# Altium PCB 3_Interface_QuadUART.PcbDoc
Units mm, origin at the board's own origin, x right, y up, seen from the top; angles counter-clockwise.
Board outline 82.5 x 29 mm, 2 copper layers (Top Layer, Bottom Layer); 48 components, 38 nets, 219 pads, 0 vias.
Unrouted connection lines stored in the file: 121.
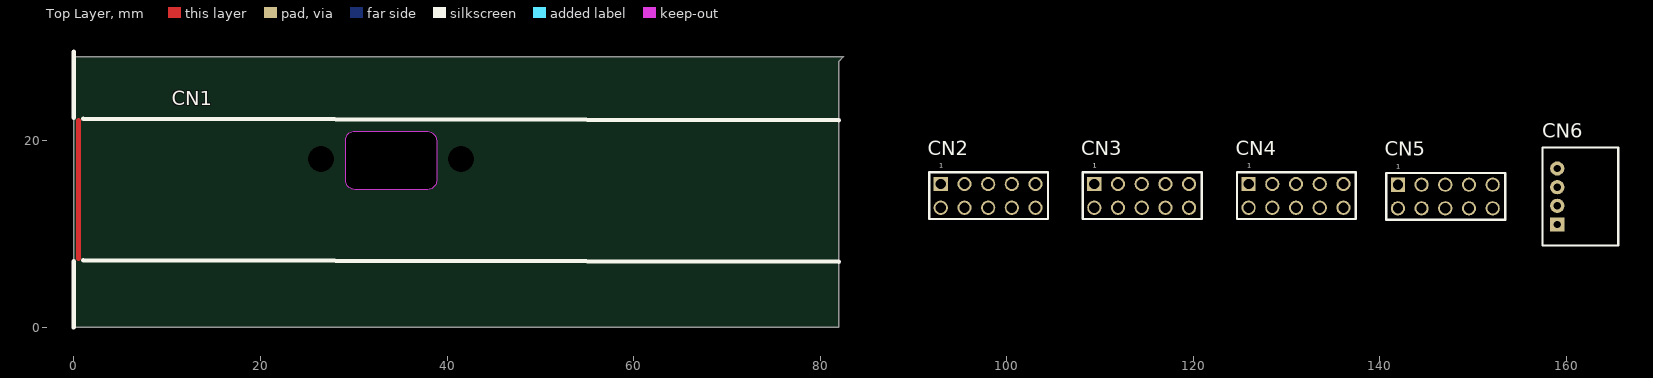
[diagram p0: Top Layer view]
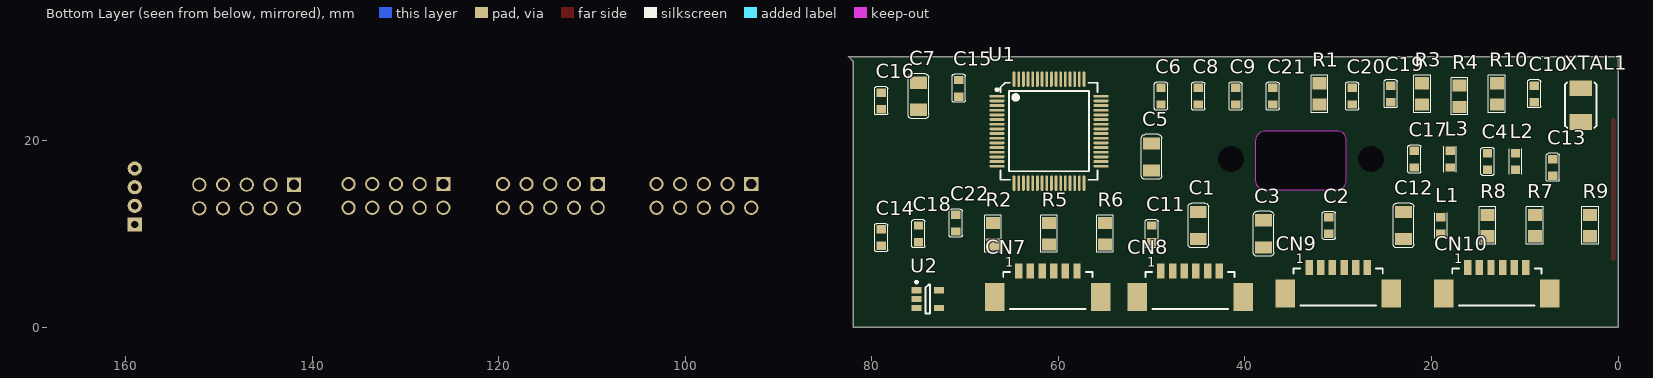
[diagram p1: Bottom Layer view, seen from below]

## Layer stack, top to bottom
Top Solder: solder mask 0.0102, Solder Resist, Dk 3.5
Top Layer: signal copper 0.0356
Dielectric 1: dielectric 0.32, FR-4, Dk 4.8
Bottom Layer: signal copper 0.0356
Bottom Solder: solder mask 0.0102, Solder Resist, Dk 3.5

## Board outline
0,0 0,29 82.5,29 82,28.5 82,0
cut-out: 29.125,15.75 29.125,20.05 cw(c30.075,20.05) 30.075,21 37.825,21 cw(c37.825,19.95) 38.875,19.95 38.875,15.7 cw(c37.925,15.7) 37.925,14.75 30.125,14.75 cw(c30.125,15.75)

## Design rules (kind name [scope] priority, off if disabled: settings)
Clearance [All] p1: gap=0.254 ignorepadtopadclearanceinfootprint=FALSE except(0: Arc-Hole Track-Hole SMDPad-Hole THPad-Hole Via-Hole Fill-Hole Poly-Hole Region-Hole Text-Hole)
PolygonConnect [All] p1: connectstyle=Relief reliefconductorwidth=0.254 reliefentries=4 polygonreliefangle="90 Angle" airgapwidth=0.254
RoutingVias [All] p1: holewidth=0.711 width=1.27 viastyle="Through Hole" minholewidth=0.711 minwidth=1.27 maxholewidth=0.711 maxwidth=1.27
SolderMaskExpansion [All] p1: expansion=0.102
Width [All] p1: maxlimit=0.254 minlimit=0.254 preferedwidth=0.254
30 further rules are at their usual default settings.

## Components (designator, comment, footprint, x,y, rotation, side; value= is the part's Value field where it differs from the comment)
C1 "GRM31CR71E106KA12K" C1206_MD 45,10.889 r90 bottom
C2 "C1608X7R1H104K080AA" C0603_MD 31,10.889 r270 bottom
C3 "GRM31CR71E106KA12K" C1206_MD 38,10 r90 bottom
C4 "C1608X7R1H104K080AA" C0603_MD 14,17.75 r270 bottom
C5 "GRM31CR71E106KA12K" C1206_MD 50,18.25 r90 bottom
C6 "C1608X7R1H104K080AA" C0603_MD 49,24.75 r270 bottom
C7 "GRM31CR71E106KA12K" C1206_MD 75,24.75 r90 bottom
C8 "C1608X7R1H104K080AA" C0603_MD 45,24.75 r270 bottom
C9 "C1608X7R1H104K080AA" C0603_MD 41,24.75 r270 bottom
C10 "C1608X7R1H104K080AA" C0603_MD 9,25 r90 bottom
C11 "C1608X7R1H104K080AA" C0603_MD 50,10 r270 bottom
C12 "GRM31CR71E106KA12K" C1206_MD 23,10.889 r90 bottom
C13 "CL10C120JB8NNNC" C0603_MD 7,17.111 r90 bottom
C14 "CL10C120JB8NNNC" C0603_MD 79,9.593 r90 bottom
C15 "C1608X7R1H104K080AA" C0603_MD 70.67,25.6 r90 bottom
C16 "C1608X7R1H104K080AA" C0603_MD 79,24.25 r90 bottom
C17 "C1608X7R1H104K080AA" C0603_MD 21.84,18 r90 bottom
C18 "C1608X7R1H104K080AA" C0603_MD 75,10 r90 bottom
C19 "C1608X7R1H104K080AA" C0603_MD 24.38,25 r90 bottom
C20 "C1608X7R1H104K080AA" C0603_MD 28.506,24.75 r90 bottom
C21 "C1608X7R1H104K080AA" C0603_MD 37.015,24.75 r270 bottom
C22 "C1608X7R1H104K080AA" C0603_MD 71,11.143 r90 bottom
CN1 "MUSBR-E551-30" "RUGGED USB MINI AB VERTICAL" 34,18 r180 top
CN2 "61301021121" "CONN HEADER 61301021121" 98,14.069 r0 top
CN3 "61301021121" "CONN HEADER 61301021121" 114.46,14.069 r0 top
CN4 "61301021121" "CONN HEADER 61301021121" 131,14.069 r0 top
CN5 "61301021121" "CONN HEADER 61301021121" 147,14 r0 top
CN6 "S4B-PH-K-S(LF)(SN)" "CONN HEADER R/A 4POS 2MM" 159,14 r90 top
CN7 "53398-0671" "PICO BLADE 0533980671" 61.125,4.625 r180 bottom
CN8 "53398-0671" "PICO BLADE 0533980671" 45.875,4.625 r180 bottom
CN9 "53398-0671" "PICO BLADE 0533980671" 30,5 r180 bottom
CN10 "53398-0671" "PICO BLADE 0533980671" 13,5 r180 bottom
L1 "BLM18EG101TN1D" L0603 19,10.889 r270 bottom
L2 "BLM18EG101TN1D" L0603 11,17.75 r270 bottom
L3 "BLM18EG101TN1D" L0603 18,18 r270 bottom
R1 "CRCW080510K0FKEA" R0805_MD 32,25 r270 bottom value=10k
R2 "CRCW080510K0FKEA" R0805_MD 67,10 r270 bottom value=10k
R3 "CRCW080510K0FKEA" R0805_MD 21,25 r270 bottom value=10k
R4 "RMCF0805FT12K0" R0805_MD 17,24.75 r270 bottom
R5 "CRCW080510K0FKEA" R0805_MD 61,10 r270 bottom value=10k
R6 "CRCW080510K0FKEA" R0805_MD 55,10 r270 bottom value=10k
R7 "CRCW080510K0FKEA" R0805_MD 8.92,10.889 r270 bottom value=10k
R8 "CRCW080510K0FKEA" R0805_MD 14,10.889 r270 bottom value=10k
R9 "CRCW080510K0FKEA" R0805_MD 3,10.889 r270 bottom value=10k
R10 "CRCW080510K0FKEA" R0805_MD 13,25 r270 bottom value=10k
U1 "IC USB HS QUAD UART" LQFP-64 61,21 r180 bottom
U2 "TPS79333DBVR" SOT23-5 74,3 r180 bottom
XTAL1 "AA-12.000MAGE-T" "TXC 7A Series" 4,23.8 r90 bottom

## Footprints (in the part's own frame and the unit in brackets; to place one, negate y for a bottom-side part, rotate by r counter-clockwise, add the part's x,y. Pads: shape width x height; smd on the part's side, far side on the other; paste and mask are expansions set on the pad)
C0603_MD [mm] "Chip Capacitor, Body 1.6x0.8mm, IPC Medium Density"
  rect 0.9x1 smd: 1(-0.889,0) 2(0.889,0)
  silkscreen extent -1.5,-0.7 1.5,0.7, body extent -1,-0.41 1,0.38, height 0.79
C1206_MD [mm] "Chip Capacitor, Body 3.2x1.6mm, IPC Medium Density"
  rect 1.3x1.8 smd: 1(-1.45,0) 2(1.45,0)
  silkscreen extent -2.4,-1.1 2.4,1.1, body extent -2,-0.81 2,0.79, height 1.53
"CONN HEADER 61301021121" [mil] "CONN HEADER VERT 10POS 2.54MM"
  rect 60x60 hole 43.31 paste+0: 1(-200,50)
  round 60 hole 43.31 paste+0: 2(-100,50) 3(0,50) 4(100,50) 5(200,50) 6(-200,-50) 7(-100,-50) 8(0,-50) 9(100,-50) 10(200,-50)
  silkscreen extent -249,-98 253,99, body extent -249,-99 251,101, height 336
"CONN HEADER R/A 4POS 2MM" [mm] "Connector Header Through Hole, Right Angle 4 position 0.079\" (2.00mm)"
  rect 1.524x1.524 hole 0.8: 1(-3,0)
  round 1.524 hole 0.8: 2(-1,0) 3(1,0) 4(3,0)
  silkscreen extent -5.25,-6.53 5.25,1.58, body extent -4.95,-6.25 4.95,1.35, height 4.83
L0603 [mm]
  rect 0.9x1 smd: 1(-0.889,0) 2(0.889,0)
  silkscreen extent -1.38,-0.67 1.38,0.67, body extent -0.8,-0.4 0.8,0.4, height 0.95
LQFP-64 [mm] "64-Pin LQFP 0.5 mm Pitch"
  oval 1.65x0.3 smd: 1(-5.575,3.75) 2(-5.575,3.25) 3(-5.575,2.75) 4(-5.575,2.25) 5(-5.575,1.75) 6(-5.575,1.25) 7(-5.575,0.75) 8(-5.575,0.25) 9(-5.575,-0.25) 10(-5.575,-0.75) 11(-5.575,-1.25) 12(-5.575,-1.75) 13(-5.575,-2.25) 14(-5.575,-2.75) 15(-5.575,-3.25) 16(-5.575,-3.75) 33(5.575,-3.75) 34(5.575,-3.25) 35(5.575,-2.75) 36(5.575,-2.25) 37(5.575,-1.75) 38(5.575,-1.25) 39(5.575,-0.75) 40(5.575,-0.25) 41(5.575,0.25) 42(5.575,0.75) 43(5.575,1.25) 44(5.575,1.75) 45(5.575,2.25) 46(5.575,2.75) 47(5.575,3.25) 48(5.575,3.75)
  oval 0.3x1.65 smd: 17(-3.75,-5.575) 18(-3.25,-5.575) 19(-2.75,-5.575) 20(-2.25,-5.575) 21(-1.75,-5.575) 22(-1.25,-5.575) 23(-0.75,-5.575) 24(-0.25,-5.575) 25(0.25,-5.575) 26(0.75,-5.575) 27(1.25,-5.575) 28(1.75,-5.575) 29(2.25,-5.575) 30(2.75,-5.575) 31(3.25,-5.575) 32(3.75,-5.575) 49(3.75,5.575) 50(3.25,5.575) 51(2.75,5.575) 52(2.25,5.575) 53(1.75,5.575) 54(1.25,5.575) 55(0.75,5.575) 56(0.25,5.575) 57(-0.25,5.575) 58(-0.75,5.575) 59(-1.25,5.575) 60(-1.75,5.575) 61(-2.25,5.575) 62(-2.75,5.575) 63(-3.25,5.575) 64(-3.75,5.575)
  silkscreen extent -5.7,-5.2 5.2,5.2, body extent -6,-6 6,6, height 1.6
"PICO BLADE 0533980671" [mm] "CONN HEADER SMD 6POS 1.25MM"
  rect 2.1x3 smd: 0(-5.675,-1.375) 0(5.675,-1.375)
  rect 0.8x1.6 smd: 1(-3.125,1.375) 2(-1.875,1.375) 3(-0.625,1.375) 4(0.625,1.375) 5(1.875,1.375) 6(3.125,1.375)
  silkscreen extent -4.77,-2.7 4.77,1.3, body extent -6.32,-2.5 6.32,1.7, height 4.7
R0805_MD [mm] "Chip Resistor, Body 2.0x1.3mm, IPC Medium Density"
  rect 1.3x1.5 smd: 1(-1.143,0) 2(1.143,0)
  silkscreen extent -2,-0.9 2,0.9, body extent -1,-0.63 1,0.63, height 0.47
"RUGGED USB MINI AB VERTICAL" [mm]
  round 1.524 hole 2.8: S0(-7.5,0) S1(7.5,0)
  Top Layer pour cut-out: -3.875,-3 3.875,-3 4.258,-2.924 4.582,-2.707 4.799,-2.383 4.875,-2 4.875,-2 4.875,2.25 4.799,2.633 4.582,2.957 4.258,3.174 3.875,3.25 3.875,3.25 -3.875,3.25 -4.258,3.174 -4.582,2.957 -4.799,2.633 -4.875,2.25 -4.875,2.25 -4.875,-2 -4.799,-2.383 -4.582,-2.707 -4.258,-2.924 -3.875,-3
  Top Layer pour cut-out: 0,0
  body extent -32,-5 23.8,27.75, height 64.69
SOT23-5 [mm]
  rect 1.1x0.65 smd: 1(-1.2,0.95) 2(-1.2,0) 3(-1.2,-0.95) 4(1.2,-0.95) 5(1.2,0.95)
  silkscreen extent -1.32,-1.55 0.25,1.95, body extent -1.5,-1.5 1.5,1.5, height 1.3
"TXC 7A Series" [mm]
  rect 1.7x2.4 smd: 1(-1.8,0) 2(1.8,0)
  silkscreen extent -2.45,-1.7 2.45,1.7, body extent -2.5,-1.6 2.5,1.6, height 1.35

## Part data
C1 C3 C5 C7 C12: "CAP CER 10UF 25V X7R 1206", Capacitance=10uF, Case/Package=1206, Dielectric=X7R, Manufacturer=Murata, Max Operating Temperature=125°C, Min Operating Temperature=-55°C, Supplier Part Number 1=490-14678-1-ND, Tolerance=10%, Voltage=25V, ComponentLink1Description=https://www.murata.com/~/media/webrenewal/support/library/catalog/products/capacitor/mlcc/c02e.ashx?la=en-us&src-supplier=Digi-Key, ComponentLink1URL=https://www.murata.com/~/media/webrenewal/support/library/catalog/products/capacitor/mlcc/c02e.ashx?la=en-us&src-supplier=Digi-Key, ComponentLink2Description=https://search.murata.co.jp/Ceramy/image/img/A01X/G101/ENG/GRM31CR71E106KA12-01.pdf?src-supplier=Digi-Key, ComponentLink2URL=https://search.murata.co.jp/Ceramy/image/img/A01X/G101/ENG/GRM31CR71E106KA12-01.pdf?src-supplier=Digi-Key, Lead Free="Lead Free", Length=0.126inch, Manufacturer Part Number=GRM31CR71E106KA12K, Mount="Surface Mount", Packaging="Tape and Reel", Pricing 1="1=0.88, 10=0.652, 100=0.4469, 500=0.35378, 1000=0.29792, 2500=0.2793 (USD)", Pricing 2="1=0.88, 10=0.652, 100=0.446, 250=0.446, 500=0.353, 1000=0.297 (USD)", Stock 1=11567, Stock 2=5051, Supplier 1=Digi-Key, Supplier 2=Mouser, Supplier Part Number 2=81-GRM31CR71E106KA2K, Thickness=0.071inch, Voltage Rating=25V, Voltage Rating (DC)=25V, Width=0.063inch
C2 C4 C6 C8 C9 C10 C11 C15 C16 C17 C18 C19 C20 C21 C22: "TDK - C1608X7R1H104K080AA - SMD Multilayer Ceramic Capacitor, 0.1 µF, 50 V, 0603 [1608 Metric], ± 10%, X7R, C Series", Capacitance=100nF, Case/Package=0603, Case Code (Metric)=1608, Dielectric=X7R, Dielectric Material=Ceramic, Manufacturer=TDK, Max Operating Temperature=125°C, Min Operating Temperature=-55°C, Package Quantity=1, Supplier Part Number 1=445-1314-1-ND, Tolerance=10%, Voltage=50V, Case Code (Imperial)=0603, ComponentLink1Description=https://product.tdk.com/info/en/catalog/spec/mlccspec_commercial_general_midvoltage_en.pdf?src-supplier=Digi-Key, ComponentLink1URL=https://product.tdk.com/info/en/catalog/spec/mlccspec_commercial_general_midvoltage_en.pdf?src-supplier=Digi-Key, ComponentLink2Description=http://uk.rs-online.com/webdocs/13d1/0900766b813d1103.pdf?src-supplier=RSComponents, ComponentLink2URL=http://uk.rs-online.com/webdocs/13d1/0900766b813d1103.pdf?src-supplier=RSComponents, ComponentLink3Description=http://www.tdk.co.jp/tefe02/e412_c.pdf?src-supplier=Avnet+Europe, ComponentLink3URL=http://www.tdk.co.jp/tefe02/e412_c.pdf?src-supplier=Avnet+Europe, ComponentLink4Description=http://www.farnell.com/datasheets/2792994.pdf?src-supplier=Farnell, ComponentLink4URL=http://www.farnell.com/datasheets/2792994.pdf?src-supplier=Farnell, ComponentLink5Description=http://www.farnell.com/datasheets/1744655.pdf?src-supplier=Element14, ComponentLink5URL=http://www.farnell.com/datasheets/1744655.pdf?src-supplier=Element14, Composition=Ceramic, Depth=0.8mm, Height=0.8mm, Lead Free="Lead Free", Length=1.6mm, Manufacturer Part Number=C1608X7R1H104K080AA, Mount="Surface Mount", Number of Pins=2, Packaging="Tape and Reel", Pricing 1="1=0.12, 10=0.088, 100=0.0413, 500=0.02896, 1000=0.02397 (USD)", Pricing 2="1=0.12, 10=0.088, 100=0.041, 500=0.029, 1000=0.024, 4000=0.017, 8000=0.016, 24000=0.013, 48000=0.011 (USD)", Radiation Hardening=No, REACH SVHC="No SVHC", Stock 1=513759, Stock 2=34512, Supplier 1=Digi-Key, Supplier 2=Mouser, Supplier Part Number 2=810-C1608X7R1H104K, Termination=SMD/SMT, Thickness=0.037inch, Voltage Rating=50V, Voltage Rating (DC)=50V, Weight=7.1E-05oz, Width=0.8mm
C13 C14: "Cap Ceramic 12pF 50VDC C0G 5% SMD 0603 Paper T/R", Capacitance=12pF, Case/Package=0603, Case Code (Metric)=1608, Dielectric=C0G, Manufacturer=Samsung, Max Operating Temperature=125°C, Min Operating Temperature=-55°C, Package Quantity=1, Supplier Part Number 1=1276-1254-1-ND, Temperature Coefficient=300ppm/°C, Tolerance=5%, Voltage=50V, Case Code (Imperial)=0603, ComponentLink1Description=https://media.digikey.com/pdf/Data%20Sheets/Samsung%20PDFs/CL_Series_MLCC_ds.pdf?src-supplier=Digi-Key, ComponentLink1URL=https://media.digikey.com/pdf/Data%20Sheets/Samsung%20PDFs/CL_Series_MLCC_ds.pdf?src-supplier=Digi-Key, ComponentLink2Description=https://www.verical.com/server-webapp/html/getDatasheet?partID=640658&src-supplier=Verical, ComponentLink2URL=https://www.verical.com/server-webapp/html/getDatasheet?partID=640658&src-supplier=Verical, ComponentLink3Description=https://produktinfo.conrad.com/datenblaetter/450000-474999/457317-da-01-en-VS_KONDENSATOR_0603.pdf?src-supplier=Conrad, ComponentLink3URL=https://produktinfo.conrad.com/datenblaetter/450000-474999/457317-da-01-en-VS_KONDENSATOR_0603.pdf?src-supplier=Conrad, Contact Plating=Tin, Depth=0.8mm, Height=0.8mm, Lead Free="Lead Free", Length=1.6mm, Manufacturer Part Number=CL10C120JB8NNNC, Material=Ceramic, Mount="Surface Mount", Packaging="Tape and Reel", Pricing 1="1=0.1, 10=0.045, 100=0.0201, 500=0.01436, 1000=0.01128 (USD)", Radiation Hardening=No, Stock 1=64675, Supplier 1=Digi-Key, Thickness=0.035inch, Voltage Rating=50V, Voltage Rating (DC)=50V, Width=0.031inch
CN1: "RUGGED USB MINI AB VERTICAL", Manufacturer="Amphenol Commercial", Ratings="IP67,Waterproof,Dust Tight", Supplier Part Number 1=MUSBR-E551-30-ND, ComponentLink1Description=https://www.amphenolcanada.com/ProductSearch/Drawings/AC/MUSBRE551XX.pdf?src-supplier=Digi-Key, ComponentLink1URL=https://www.amphenolcanada.com/ProductSearch/Drawings/AC/MUSBRE551XX.pdf?src-supplier=Digi-Key, Connector Type=USB, Features=Shielded, Gender=Receptacle, Manufacturer Part Number=MUSBR-E551-30, Mount="Through Hole,Vertical", Number of Contacts=5, Packaging=Tray, Pricing 1="1=10.83, 10=9.846, 25=9.6, 50=8.8614, 100=8.3691, 250=7.63064, 500=7.13836, 1000=7.111 (USD)", Pricing 2="1=10.83, 10=9.84, 25=8.86, 100=8.36, 250=7.81, 500=7.81 (USD)", Stock 1=160, Stock 2=65, Supplier 1=Digi-Key, Supplier 2=Mouser, Supplier Part Number 2=523-MUSBR-E551-30
CN2 CN3 CN4 CN5: "WURTH ELEKTRONIK - 61301021121 - Board-To-Board Connector, 2.54 mm, 10 Contacts, Header, WR-PHD Series, Through Hole, 2 Rows", Color=Black, Current Rating=3A, Flammability Rating="UL94 V-0", Insulation Resistance=1GR, Manufacturer="Wurth Electronics", Max Operating Temperature=125°C, Min Operating Temperature=-40°C, Package Quantity=2000, Supplier Part Number 1=732-2672-ND, Voltage Rating=250V, ComponentLink1Description=http://www.farnell.com/datasheets/1442180.pdf?src-supplier=Mouser, ComponentLink1URL=http://www.farnell.com/datasheets/1442180.pdf?src-supplier=Mouser, ComponentLink2Description=https://katalog.we-online.de/em/datasheet/6130xx21121.pdf?src-supplier=Digi-Key, ComponentLink2URL=https://katalog.we-online.de/em/datasheet/6130xx21121.pdf?src-supplier=Digi-Key, ComponentLink3Description=http://www.farnell.com/datasheets/1442180.pdf?src-supplier=Element14, ComponentLink3URL=http://www.farnell.com/datasheets/1442180.pdf?src-supplier=Element14, Connector Type="Male Pin", Contact Gender=Male, Contact Material="Copper Alloy,Copper", Contact Mating Length=0.236inch, Contact Plating=Gold, Gender=Male, Height=2.54mm, Housing Material=PBT, Insulation=Insulated, Length=12.7mm, Manufacturer Part Number=61301021121, Mount="Through Hole", Number of Contacts=10, Number of Positions=10, Number of Rows=2, Orientation=Straight, Packaging=Bulk, Pitch=2.54mm, Pricing 1="1=1.04, 10=1.019, 50=0.941, 100=0.862, 250=0.784 (USD)", Pricing 2="1=1.04, 10=1.01, 25=1.01, 50=0.941, 100=0.862, 250=0.784, 1000=0.671, 2500=0.598 (USD)", REACH SVHC=Unknown, Row Spacing=0.1inch, Stock 1=4128, Stock 2=5415, Supplier 1=Digi-Key, Supplier 2=Mouser, Supplier Part Number 2=710-61301021121, Termination="Through Hole", Width=12.7mm
CN6: "JST (JAPAN SOLDERLESS TERMINALS) - S4B-PH-K-S (LF)(SN) - CONNECTOR, HEADER, 2MM, 4 POSITION, 1ROW", Color=Natural,White, Contact Resistance=10mR, Current Rating=2A, Flammability Rating="UL94 V-0", Housing Color=Natural, Insulation Resistance=1GR, Manufacturer=JST, Max Operating Temperature=85°C, Min Operating Temperature=-25°C, Supplier Part Number 1=455-1721-ND, Voltage Rating=100V, ComponentLink1Description=http://www.jst-mfg.com/product/pdf/eng/ePH.pdf?src-supplier=Digi-Key, ComponentLink1URL=http://www.jst-mfg.com/product/pdf/eng/ePH.pdf?src-supplier=Digi-Key, Connector Type="Male Pin", Contact Material=Tin,Brass,Bronze, Contact Mating Length=0.13inch, Contact Plating=Tin, Fastening Type=Detent, Gender=Male, Height=9.4mm, Lead Free="Lead Free", Lead Pitch=2mm, Length=9.9mm, Manufacturer Part Number=S4B-PH-K-S(LF)(SN), Mount="Through Hole", Number of Contacts=4, Number of Pins=4, Number of Poles=4, Number of Positions=4, Number of Rows=1, Orientation="Right Angle", Packaging=Bulk, Pitch=2mm, Pricing 1="1=0.22, 10=0.208, 100=0.144, 500=0.12186, 1000=0.0997, 5000=0.08862, 10000=0.08031 (USD)", REACH SVHC="No SVHC", Stock 1=71034, Supplier 1=Digi-Key, Termination=Solder, Voltage Rating (AC)=100V, Width=4.5mm, Working Voltage=100V
CN7 CN8 CN9 CN10: "1.25mm Pitch PicoBlade™ Header, Surface Mount, Vertical, 6 Circuits", Color=Natural, Contact Resistance=20mR, Current Rating=1A, Flammability Rating="UL94 V-0", Insulation Resistance=100MR, Manufacturer=Molex, Max Operating Temperature=85°C, Min Operating Temperature=-40°C, Package Quantity=1000, Supplier Part Number 1=WM7610DKR-ND, Voltage Rating=125V, Body Plating=Tin, ComponentLink1Description=https://www.molex.com/pdm_docs/sd/533980671_sd.pdf?src-supplier=Digi-Key, ComponentLink1URL=https://www.molex.com/pdm_docs/sd/533980671_sd.pdf?src-supplier=Digi-Key, Contact Material=Bronze,Tin, Contact Plating=Tin, Gender=Male, Glow Wire Compliant=Non-compliant, Housing Color=Natural, Housing Material=Nylon, Lead Free="Lead Free", Lead Pitch=1.25mm, Manufacturer Part Number=53398-0671, Mount="Surface Mount", Number of Circuits=6, Number of Contacts=6, Number of Positions=6, Number of Rows=1, Orientation=Vertical, Packaging="Tape and Reel", Pitch=1.25mm, Pricing 1="1=1.39, 10=1.26, 100=1.0802, 500=0.90014 (USD)", Pricing 2="1=1.15, 10=1.01, 100=0.864, 500=0.727, 1000=0.427, 2000=0.374 (USD)", Radiation Hardening=No, REACH SVHC=Unknown, Stock 1=21086, Stock 2=26, Supplier 1=Digi-Key, Supplier 2=Mouser, Supplier Part Number 2=538-53398-0671, Termination=Solder, Voltage Rating (AC)=125V, Voltage Rating (DC)=125V, Working Voltage=125V
L1 L2 L3: "FERRITE BEAD 100 OHM 0603 1LN", Case/Package=0603, Case Code (Metric)=1608, Current Rating=2A, DC Resistance (DCR)=45mR, Manufacturer=Murata, Max Operating Temperature=125°C, Min Operating Temperature=-55°C, Package Quantity=1, Supplier Part Number 1=490-5978-1-ND, Test Frequency=100MHz, Tolerance=25%, Case Code (Imperial)=0603, ComponentLink1Description=https://www.murata.com/en-global/products/productdata/8796733767710/S0580E.pdf?src-supplier=Digi-Key, ComponentLink1URL=https://www.murata.com/en-global/products/productdata/8796733767710/S0580E.pdf?src-supplier=Digi-Key, ComponentLink2Description=http://www.murata.com/products/catalog/pdf/c31e.pdf?src-supplier=Element14, ComponentLink2URL=http://www.murata.com/products/catalog/pdf/c31e.pdf?src-supplier=Element14, ComponentLink3Description=http://search.murata.co.jp/Ceramy/image/img/PDF/ENG/L0110S0101BLM18E.pdf?src-supplier=Avnet, ComponentLink3URL=http://search.murata.co.jp/Ceramy/image/img/PDF/ENG/L0110S0101BLM18E.pdf?src-supplier=Avnet, ComponentLink4Description=http://search.murata.co.jp/Ceramy/image/img/PDF/ENG/L0110S0101BLM18E.pdf?src-supplier=Avnet+Europe, ComponentLink4URL=http://search.murata.co.jp/Ceramy/image/img/PDF/ENG/L0110S0101BLM18E.pdf?src-supplier=Avnet+Europe, ComponentLink5Description=http://search.murata.co.jp/Ceramy/image/img/PDF/ENG/L0110S0101BLM18E.pdf?src-supplier=Future+Electronics, ComponentLink5URL=http://search.murata.co.jp/Ceramy/image/img/PDF/ENG/L0110S0101BLM18E.pdf?src-supplier=Future+Electronics, ComponentLink6Description=http://uk.rs-online.com/webdocs/11b5/0900766b811b5866.pdf?src-supplier=RSComponents, ComponentLink6URL=http://uk.rs-online.com/webdocs/11b5/0900766b811b5866.pdf?src-supplier=RSComponents, ComponentLink7Description=http://www.produktinfo.conrad.com/datenblaetter/1100000-1199999/001172263-da-01-en-DROSSEL_0603_100R_1_6X0_8MM_4000ST.pdf?src-supplier=Conrad, ComponentLink7URL=http://www.produktinfo.conrad.com/datenblaetter/1100000-1199999/001172263-da-01-en-DROSSEL_0603_100R_1_6X0_8MM_4000ST.pdf?src-supplier=Conrad, ComponentLink8Description=http://www.produktinfo.conrad.com/datenblaetter/1100000-1199999/001171697-da-01-en-CHIP_DROSSEL0603_100R_2000MA_1_6X0_8MM.pdf?src-supplier=Conrad, ComponentLink8URL=http://www.produktinfo.conrad.com/datenblaetter/1100000-1199999/001171697-da-01-en-CHIP_DROSSEL0603_100R_2000MA_1_6X0_8MM.pdf?src-supplier=Conrad, Contact Plating=Tin,Matte, Core Material=Ferrite, Depth=0.8mm, Height=0.8mm, Impedance=100R, Lead Free="Lead Free", Length=1.6mm, Manufacturer Part Number=BLM18EG101TN1D, Material=Ferrite,Steel, Max Current Rating=2A, Max DC Current=2A, Number of Circuits=1, Number of Lines=1, Number of Pins=2, Packaging="Tape and Reel", Pricing 1="1=0.23, 10=0.175, 25=0.1452, 50=0.1252, 100=0.1126, 250=0.09508, 500=0.08508, 1000=0.07257 (USD)", Pricing 2="1=0.22, 10=0.125, 100=0.095, 500=0.081, 1000=0.072, 4000=0.063 (USD)", REACH SVHC="No SVHC", Stock 1=64347, Stock 2=10695, Supplier 1=Digi-Key, Supplier 2=Mouser, Supplier Part Number 2=81-BLM18EG101TN1D, Termination=SMD/SMT, Width=0.8mm
R1 R2 R3 R5 R6 R7 R8 R9 R10: "RES 10.0K OHM 1/8W 1% 0805 SMD", Case/Package=0805, Case Code (Metric)=2012, Manufacturer="Vishay Dale", Max Operating Temperature=155°C, Min Operating Temperature=-55°C, Package Quantity=5000, Power=1/8W, Power Rating=125mW, Resistance=10kR, Supplier Part Number 1=52K9795, Temperature Coefficient=100ppm/°C, Tolerance=1%, Voltage Rating=150V, Case Code (Imperial)=0805, ComponentLink1Description=http://www.mouser.com/ds/2/427/dcrcwe3-109170.pdf?src-supplier=Mouser, ComponentLink1URL=http://www.mouser.com/ds/2/427/dcrcwe3-109170.pdf?src-supplier=Mouser, ComponentLink2Description=http://uk.rs-online.com/webdocs/0d98/0900766b80d98b26.pdf?src-supplier=RSComponents, ComponentLink2URL=http://uk.rs-online.com/webdocs/0d98/0900766b80d98b26.pdf?src-supplier=RSComponents, ComponentLink3Description=http://www.alliedelec.com/m/d/0c934d6939ccefa68dbe0b96d821c8cf.pdf?src-supplier=Allied+Electronics, ComponentLink3URL=http://www.alliedelec.com/m/d/0c934d6939ccefa68dbe0b96d821c8cf.pdf?src-supplier=Allied+Electronics, ComponentLink4Description=http://www.vishay.com/docs/20035/dcrcwe3.pdf?src-supplier=Avnet+Asia, ComponentLink4URL=http://www.vishay.com/docs/20035/dcrcwe3.pdf?src-supplier=Avnet+Asia, ComponentLink5Description=http://www.vishay.com/docs/20035/dcrcwe3.pdf?src-supplier=Avnet+Europe, ComponentLink5URL=http://www.vishay.com/docs/20035/dcrcwe3.pdf?src-supplier=Avnet+Europe, ComponentLink6Description=http://www.farnell.com/datasheets/2310790.pdf?src-supplier=Element14, ComponentLink6URL=http://www.farnell.com/datasheets/2310790.pdf?src-supplier=Element14, ComponentLink7Description=http://www.vishay.com/docs/20035/dcrcwe3.pdf?src-supplier=Avnet, ComponentLink7URL=http://www.vishay.com/docs/20035/dcrcwe3.pdf?src-supplier=Avnet, ComponentLink8Description=http://www.vishay.com/docs/20035/dcrcwe3.pdf?src-supplier=Future+Electronics, ComponentLink8URL=http://www.vishay.com/docs/20035/dcrcwe3.pdf?src-supplier=Future+Electronics, Composition="Thick Film", Contact Plating=Tin, Depth=1.25mm, Height=0.45mm, Lead Free="Lead Free", Length=2mm, Manufacturer Part Number=CRCW080510K0FKEA, Military Standard=Not, Mount Type=SMD, Packaging="Tape and Reel", Pricing 2="1=0.1, 10=0.062, 100=0.025, 1000=0.01, 5000=0.007, 10000=0.006, 25000=0.005 (USD)", Pricing 6="1=0.1, 10=0.062, 100=0.0254, 1000=0.01142, 2500=0.00991 (USD)", Radiation Hardening=No, REACH SVHC=Unknown, Stock 2=101022, Stock 6=1354479, Supplier 1=Newark, Supplier 2=Mouser, Supplier 3=Digi-Key, Supplier 4=Allied, Supplier 5=Farnell, Supplier 6=Digi-Key, Supplier Part Number 2=71-CRCW0805-10K-E3, Supplier Part Number 3=541-10.0KCCT-ND, Supplier Part Number 4=70201192, Supplier Part Number 5=1632457, Supplier Part Number 6=541-10.0KCDKR-ND, Termination=SMD/SMT, Voltage Rating (DC)=150V, Weight=0.000194oz, Width=1.25mm
R4: "Resistor, SMT, 0805, 12K Ohm, +/-1%, +/-100ppm, Thk Film, T/R Marked", Case/Package=0805, Case Code (Metric)=2012, Manufacturer="Stackpole Electronics", Max Operating Temperature=155°C, Max Power Dissipation=125mW, Min Operating Temperature=-55°C, Resistance=12kR, Supplier Part Number 1=RMCF0805FT12K0CT-ND, Temperature Coefficient=100ppm/°C, Tolerance=1%, Case Code (Imperial)=0805, ComponentLink1Description=https://www.seielect.com/catalog/SEI-RMCF_RMCP.pdf?src-supplier=Avnet, ComponentLink1URL=https://www.seielect.com/catalog/SEI-RMCF_RMCP.pdf?src-supplier=Avnet, ComponentLink2Description=https://www.seielect.com/Catalog/SEI-RMCF_RMCP.pdf?src-supplier=Digi-Key, ComponentLink2URL=https://www.seielect.com/Catalog/SEI-RMCF_RMCP.pdf?src-supplier=Digi-Key, ComponentLink3Description=https://www.seielect.com/catalog/SEI-Packaging.pdf?src-supplier=Digi-Key, ComponentLink3URL=https://www.seielect.com/catalog/SEI-Packaging.pdf?src-supplier=Digi-Key, ComponentLink4Description=http://seielect.com/Catalog/SEI-RMCF_RMCP.pdf?src-supplier=Future+Electronics, ComponentLink4URL=http://seielect.com/Catalog/SEI-RMCF_RMCP.pdf?src-supplier=Future+Electronics, ComponentLink5Description=http://components.arrow.com/part/dataview/40964023S7542466N1174?src-supplier=Arrow, ComponentLink5URL=http://components.arrow.com/part/dataview/40964023S7542466N1174?src-supplier=Arrow, Composition="Thick Film", Contact Plating=Tin,Matte, Features="Automotive AEC-Q200", Height=0.026inch, Lead Free="Lead Free", Length=0.079inch, Manufacturer Part Number=RMCF0805FT12K0, Mount="Surface Mount", Number of Terminations=2, Packaging="Tape and Reel", Power Rating=125mW, Pricing 1="1=0.1, 10=0.026, 100=0.0104, 1000=0.00466, 2500=0.00405 (USD)", Radiation Hardening=No, Stock 1=30304, Supplier 1=Digi-Key, Width=0.049inch
U1: library part FT4232HL-REEL, "FTDI - FT4232HL-REEL - USB-UART/MPSSE, 4232, QUAD, 64LQFP", Case/Package=LQFP, Dual Supply Voltage=3.3V, Manufacturer=FTDI, Max Operating Temperature=85°C, Max Supply Voltage=3.63V, Min Operating Temperature=-40°C, Min Supply Voltage=1.62V, Operating Supply Current=70mA, Package Quantity=1000, Supplier Part Number 1=768-1026-1-ND, ComponentLink1Description=http://www.ftdichip.com/Support/Documents/AppNotes/AN_128_User_Guide_For_FT4232H_Factory%20test%20utility.pdf?src-supplier=Digi-Key, ComponentLink1URL=http://www.ftdichip.com/Support/Documents/AppNotes/AN_128_User_Guide_For_FT4232H_Factory%20test%20utility.pdf?src-supplier=Digi-Key, ComponentLink2Description=http://www.alliedelec.com/images/products/datasheets/bm/FTDI/70403916.pdf?src-supplier=Allied+Electronics, ComponentLink2URL=http://www.alliedelec.com/images/products/datasheets/bm/FTDI/70403916.pdf?src-supplier=Allied+Electronics, ComponentLink3Description=http://www.ftdichip.com/Support/Documents/DataSheets/ICs/DS_FT4232H.pdf?src-supplier=Future+Electronics, ComponentLink3URL=http://www.ftdichip.com/Support/Documents/DataSheets/ICs/DS_FT4232H.pdf?src-supplier=Future+Electronics, ComponentLink4Description=https://www.verical.com/server-webapp/html/getDatasheet?partID=643215&src-supplier=Verical, ComponentLink4URL=https://www.verical.com/server-webapp/html/getDatasheet?partID=643215&src-supplier=Verical, ComponentLink5Description=http://datasheet.iiic.cc/ftdi/FT4232HL-REEL.pdf?src-supplier=IIIC, ComponentLink5URL=http://datasheet.iiic.cc/ftdi/FT4232HL-REEL.pdf?src-supplier=IIIC, Data Rate=480Mbps, ESD Protection=Yes, Height=1.4mm, Interface=UART, Lead Free="Lead Free", Length=10.1mm, Manufacturer Part Number=FT4232HL-REEL, Mount="Surface Mount", Number of Channels=1, Number of Pins=64, Number of Transceivers=4, Operating Supply Voltage=3.3V, Packaging="Tape and Reel", Pricing 1="1=8.3, 10=8.09, 50=7.46, 100=7.14, 500=6.88006 (USD)", Pricing 2="1=8.3, 25=8.09, 50=7.46, 100=7.14, 500=6.88, 1000=6.08 (USD)", Radiation Hardening=No, Stock 1=18748, Stock 2=21282, Supplier 1=Digi-Key, Supplier 2=Mouser, Supplier Part Number 2=895-FT4232HL, Weight=0.012088oz, Width=10.1mm
U2: "TEXAS INSTRUMENTS - TPS79333DBVR - IC, V REG, LINEAR, 0.2A, SOT-23-5", Case/Package=SOT-23, Current Rating=200mA, Dropout Voltage=102mV, Input Bias Current=170uA, Manufacturer="Texas Instruments", Max Input Voltage=5.5V, Max Operating Temperature=125°C, Max Output Voltage=3.3V, Max Power Dissipation=560mW, Min Current Limit=285mA, Min Input Voltage=2.7V, Min Operating Temperature=-40°C, Output Voltage Accuracy=2%, Package Quantity=1, Quiescent Current=200uA, Supplier Part Number 1=296-12961-1-ND, Accuracy=2%, ComponentLink1Description=http://www.ti.com/general/docs/lit/getliterature.tsp?genericPartNumber=TPS793&amp;&amp;fileType=pdf&src-supplier=Farnell, ComponentLink1URL=http://www.ti.com/general/docs/lit/getliterature.tsp?genericPartNumber=TPS793&amp;&amp;fileType=pdf&src-supplier=Farnell, ComponentLink2Description=http://www.jameco.com/Jameco/Products/ProdDS/1123416.pdf?src-supplier=Jameco, ComponentLink2URL=http://www.jameco.com/Jameco/Products/ProdDS/1123416.pdf?src-supplier=Jameco, Height=1.15mm, Lead Free="Lead Free", Length=2.9mm, Manufacturer Part Number=TPS79333DBVR, Max Output Current=200mA, Max Supply Voltage=5.5V, Min Output Voltage=3.3V, Min Supply Voltage=2.7V, Nominal Output Voltage=3.3V, Number of Outputs=1, Number of Pins=5, Number of Regulators=1, Output Current=200mA, Output Type=Fixed, Output Voltage=3.3V, Packaging="Tape and Reel", Polarity=Positive, Power Dissipation=560mW, Power Rating=560mW, Pricing 1="1=0.73, 10=0.64, 25=0.6016, 100=0.4559, 250=0.388, 500=0.3686, 1000=0.2813 (USD)", Pricing 2="1=0.72, 10=0.6, 100=0.379, 1000=0.289, 2000=0.282, 3000=0.252, 9000=0.242, 48000=0.233 (USD)", Radiation Hardening=No, REACH SVHC="No SVHC", Stock 1=21565, Stock 2=31707, Supplier 1=Digi-Key, Supplier 2=Mouser, Supplier Part Number 2=595-TPS79333DBVR, Termination=SMD/SMT, Width=1.6mm
XTAL1: "Crystals 12.000MHz 30ppm 12pF -40C to 85C", Case/Package=SMD/SMT, ESR (Equivalent Series Resistance)=100R, Frequency=12MHz, Frequency Stability=50ppm, Frequency Tolerance=30ppm, Manufacturer=TXC, Max Operating Temperature=85°C, Min Operating Temperature=-40°C, Package Quantity=1000, Ratings=AEC-Q200, Supplier Part Number 1=887-1656-1-ND, ComponentLink1Description=http://www.txccrystal.com/images/pdf/number-crystal-automotive.pdf?src-supplier=Digi-Key, ComponentLink1URL=http://www.txccrystal.com/images/pdf/number-crystal-automotive.pdf?src-supplier=Digi-Key, ComponentLink2Description=http://www.farnell.com/datasheets/1811860.pdf?src-supplier=Element14, ComponentLink2URL=http://www.farnell.com/datasheets/1811860.pdf?src-supplier=Element14, Height=0.053inch, Length=0.197inch, Manufacturer Part Number=AA-12.000MAGE-T, Mount="Surface Mount", Number of Pins=2, Packaging="Tape and Reel", Pricing 1="1=0.83, 10=0.734, 50=0.6858, 100=0.6061, 500=0.5742 (USD)", Pricing 2="1=0.83, 10=0.734, 50=0.685, 100=0.606, 500=0.574, 1000=0.435 (USD)", REACH SVHC="No SVHC", Stock 1=2398, Stock 2=4856, Supplier 1=Digi-Key, Supplier 2=Mouser, Supplier Part Number 2=717-AA-12.000MAGE-T, Termination=SMD/SMT, Tolerance=30ppm, Width=3.2mm

## Nets (pads, with @x,y where several pads share a name; then routed paths per layer and width w, separated by ;. In a path a pad name is that pad's centre, name@x,y a point inside that pad or via, vN(x,y) a via of type N, cw(c..) or ccw(c..) an arc to the next point about the centre after c; other vN are vias at no path point)
1V8: C5.1 C19.1 C20.1 C21.1 C22.1 U1.12 U1.37 U1.49 U1.64
3V3: C1.1 C4.1 C11.1 C15.1 C16.1 C17.1 C18.1 L1.1 L2.1 R4.1 R9.1 U1.20 U1.31 U1.42 U1.50 U1.56 U2.5
5V: C8.1 L3.2 U2.1 U2.3
+BAT: CN6.3 CN6.4
-BAT: CN6.1 CN6.2
GND: C1.2 C2.1 C3.1 C4.2 C5.2 C6.2 C7.2 C8.2 C10.2 C11.2 C12.2 C13.2 C14.2 C15.2 C16.2 C17.2 C18.2 C19.2 C20.2 C21.2 C22.2 CN7.1 CN8.1 CN9.1 CN10.1 R1.2 R5.2 R6.1 R7.1 R8.2 R10.2 U1.1 U1.5 U1.10 U1.11 U1.13 U1.15 U1.25 U1.35 U1.47 U1.51 U1.60 U2.2
JTAG_TCK: CN2.7 CN3.7 CN4.7 CN5.7 CN7.4 CN8.4 CN9.4 CN10.4
JTAG_TDO_TDI: CN2.1 CN3.1 CN4.1 CN5.1 CN7.5 CN8.5 CN9.5 CN10.5
JTAG_VCC: CN2.2 CN3.2 CN4.2 CN5.2 CN7.6 CN8.6 CN9.6 CN10.6
NetC9_1: C9.1 L3.1
NetC9_2: C9.2
NetC10_1: C10.1 R4.2 U1.14
NetC12_1: C12.1 U2.4
NetC13_1: C13.1 U1.2 XTAL1.1
NetC14_1: C14.1 U1.3 XTAL1.2
NetCN1_2: R2.1
NetCN1_3: R3.1
NetR1_1: R1.1 U1.24
NetR2_2: R2.2 U1.7
NetR3_2: R3.2 U1.8
NetR5_1: R5.1 U1.34
NetR6_2: R6.2 U1.6
NetR7_2: R7.2 U1.63
NetR8_1: R8.1 U1.46
NetR9_2: R9.2 U1.61
NetR10_1: R10.1 U1.59
RX1: U1.17
RX2: U1.27
RX3: U1.39
RX4: U1.52
TX1: U1.16
TX2: U1.26
TX3: U1.38
TX4: U1.48
UART0_RX: CN7.2 CN8.2 CN9.2 CN10.2
UART0_TX: CN7.3 CN8.3 CN9.3 CN10.3
VPHY: C6.1 C7.1 L2.2 U1.4
VPLL: C2.2 C3.2 L1.2 U1.9
pads on no net: CN1.S0 CN1.S1 CN2.3 CN2.4 CN2.5 CN2.6 CN2.8 CN2.9 CN2.10 CN3.3 CN3.4 CN3.5 CN3.6 CN3.8 CN3.9 CN3.10 CN4.3 CN4.4 CN4.5 CN4.6 CN4.8 CN4.9 CN4.10 CN5.3 CN5.4 CN5.5 CN5.6 CN5.8 CN5.9 CN5.10 CN7.0 CN8.0 CN9.0 CN10.0 U1.18 U1.19 U1.21 U1.22 U1.23 U1.28 U1.29 U1.30 U1.32 U1.33 U1.36 U1.40 U1.41 U1.43 U1.44 U1.45 U1.53 U1.54 U1.55 U1.57 U1.58 U1.62
copper on no net: | length 14.9
  Top Layer w0.5: 0.5,7.325 0.5,22.175

## Silkscreen, mask and mechanical layers (free items; w line width, h text height)
Top Overlay:
  lines w0.5: -0.025,0.025 ccw(c0,0.025) 0,0 0,7.075 ; 0,22.425 0,29.5 ; 1,7.15 82,7 ; 1,22.325 82,22.175
Bottom ASM:
  lines w0.1: 29.125,15.75 ccw(c30.125,15.75) 30.125,14.75 37.925,14.75 ccw(c37.925,15.7) 38.875,15.7 38.875,19.95 ccw(c37.825,19.95) 37.825,21 30.075,21 ccw(c30.075,20.05) 29.125,20.05 29.125,16.65 29.125,15.75

## Text inside footprints (layer, text, board x,y; h text height)
CN2: Top Overlay "1" at 92.75,17.069 h0.5
CN3: Top Overlay "1" at 109.21,17.069 h0.5
CN4: Top Overlay "1" at 125.75,17.069 h0.5
CN5: Top Overlay "1" at 141.75,17 h0.5
CN7: Bottom Overlay "1" at 65.7,6.475 h1
CN8: Bottom Overlay "1" at 50.45,6.475 h1
CN9: Bottom Overlay "1" at 34.575,6.85 h1
CN10: Bottom Overlay "1" at 17.575,6.85 h1